# Altium PCB CAN-to-CAN.PcbDoc (part 2 of 2)
Units mil, origin at the board's own origin, x right, y up, seen from the top; angles counter-clockwise.
Board outline 5998 x 3656 mil, 2 copper layers (Top Layer, Bottom Layer); 112 components, 87 nets, 365 pads, 152 vias.
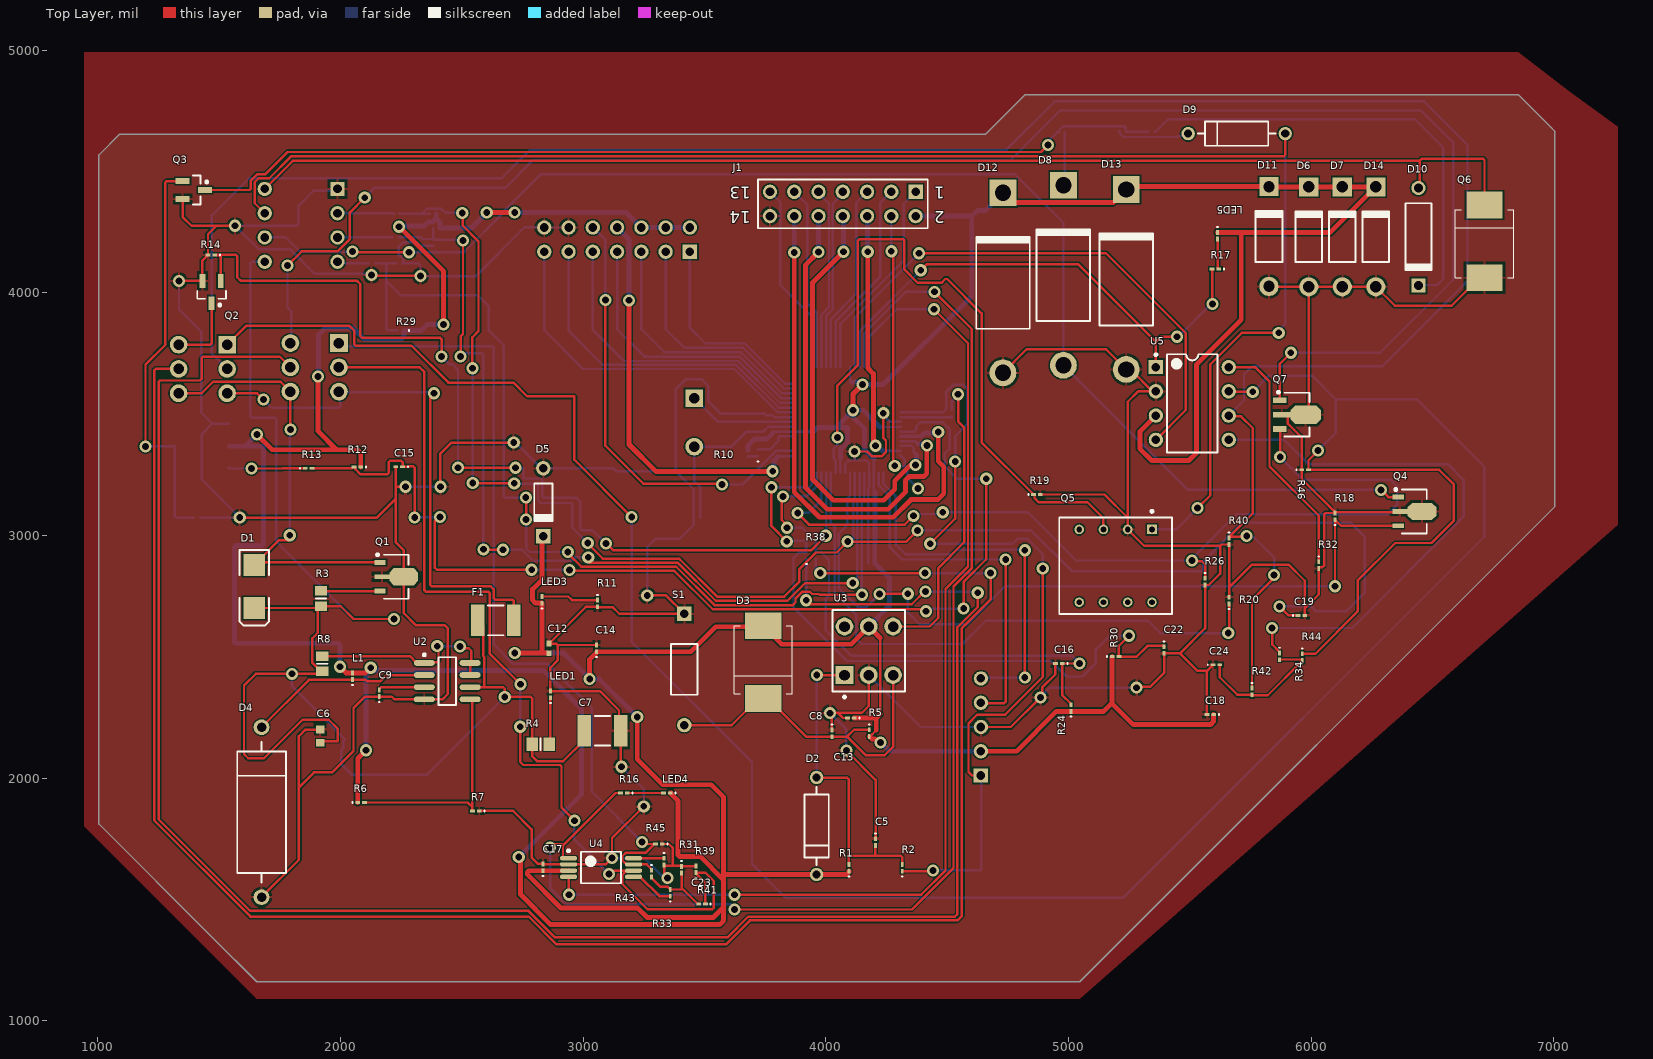
[diagram p0: Top Layer view]

## Via types
v1: diameter 50, hole 28, Top Layer to Bottom Layer, 152 vias

## Nets (pads, with @x,y where several pads share a name; then routed paths per layer and width w, separated by ;. In a path a pad name is that pad's centre, name@x,y a point inside that pad or via, vN(x,y) a via of type N, cw(c..) or ccw(c..) an arc to the next point about the centre after c; other vN are vias at no path point) (continued)
NetR9_2: (continued)
  Bottom Layer w10: U1.8 4308.7,3487.61 4518.09,3487.61 4519,3488.51 R9.2
NetR10_2: R10.2 U1.37 | length 181.8
  Bottom Layer w10: R10.2 3769.78,3354.78 3803.56,3388.56 3803.56,3402.56 3809.52,3408.52 U1.37
NetR31_1: R31.1 U4.8 | length 126.4
  Top Layer w10: U4.8 3333.39,1670.39 R31.1
NetR32_1: R32.1 U5.8 | length 1019.5
  Top Layer w10: U5.8 5769,3694 5828,3635 5828,3285 6031,3082 R32.1
NetR33_1: R33.1 U4.5 | length 184.1
  Top Layer w10: U4.5 3234.43,1593.61 3314.11,1513.94 R33.1
NetR34_1: R34.1 U5.5 | length 2282.3
  Top Layer w10: v1(5839,2619) 5840,2618 5840,2549.94 5870,2519.94 R34.1
  Bottom Layer w10: U5.5 5889,3394 5989,3294 6563,3294 6628,3229 6628,3078 6169,2619 v1(5839,2619)
PGC: J7.5 U1.17 | length 1581.3
  Top Layer w10: v1@4819,2414 v1(4820,2415) v1(4820,2939)
  Bottom Layer w10: U1.17 4237.49,3212.51 4289,3161 4289,2962.14 4328.14,2923 4521.43,2923 4538.93,2940.5 4818.5,2940.5 v1(4820,2939) ; J7.5 4641,2413 4818,2413 v1(4820,2415)
PGD: J7.4 U1.18 | length 1516.2
  Top Layer w10: J7.4 4641,2309 4735.14,2309 4741,2314.86 v1(4741,2901)
  Bottom Layer w10: U1.18 4217.8,3208.2 4263,3163 4263,2952 4314,2901 v1(4741,2901)
RESET: C5.2 D2.1 R1.2 R2.2 U3.1 | length 1322.1
  Top Layer w10: D2.1 3963,2002 4088.14,2002 4094,1996.14 4094,1674.14 ; v1(3963,2425) U3.1 ; R1.2 4094.09,1645.47 4094.09,1662.05 4094,1662.14 4094,1674.14 ; C5.2 4204.5,1722.72 4204.5,1680 ; R2.2 4315,1674.14 4309.14,1680 4204.5,1680 ; 4094,1674.14 4099.86,1680 4200,1680 4204.5,1680
  Bottom Layer w10: D2.1 3962.5,2003.5 3962.5,2424.5 v1(3963,2425)
RX: J2.10 U1.34 | length 1824.2
  Top Layer w10: v1(3092,3970) 3092,3370 3248,3214 3568,3214 v1(3572,3210)
  Bottom Layer w10: J2.10 3092,4217 v1(3092,3970) ; v1(3572,3210) 3657,3210 3796.81,3349.81 3871,3349.81 U1.34
TX: J2.8 U1.33 | length 1693
  Top Layer w20: v1(3189,3969) 3189,3375 3301,3263 3779,3263 v1(3781,3265)
  Bottom Layer w10: 3804,3326 3867.57,3326 U1.33
  Bottom Layer w20: J2.8 3189,4220 v1(3189,3969) ; v1(3781,3265) 3786.74,3270.74 3786.74,3308.74 3804,3326
WDI: R9.1 U3.4 | length 1251.2
  Top Layer w10: U3.4 4428,2625 4464,2661 4464,2866 4570,2972 4570,3445 4545,3470 v1(4545,3582)
  Bottom Layer w10: R9.1 4519,3551.43 4545,3577.43 v1(4545,3582)
pads on no net: Q5.4 Q5.5 Q5.6 Q5.7 Q5.8 U1.1 U1.2 U1.3 U1.4 U1.5 U1.6 U1.35 U1.36 U1.62 U1.63 U1.64 U3.6

## Polygon pours and split planes (outlines as drawn)
GND on Bottom Layer "Bottom Layer-GND" (solid, pour order 6): 5759,5084
GND on Bottom Layer "GND_L02_P004" (solid, pour order 4): 902.35,4591.35 1258,4947 7106,4947 7106,2973.9 5046,1052.86 902.35,1052.86 937,3436
GND on Top Layer "Top Layer-GND" (solid, pour order 8): 944.5,4992.11 6853,4992.11 7060,4832 7264,4685 7264,3045 5046,1091 1655,1091 944.5,1801.5 944.5,2292

## Silkscreen, mask and mechanical layers (free items; w line width, h text height)
Mechanical 1:
  lines w10: 1005,1811 1005,4568 1090,4653 2817.75,4653 4658,4653 4822,4817 6853,4817 6931,4739 6949,4721 6985,4685 7003,4667 7003,3118 5046,1161 1655,1161 1473,1343 1005,1811

## Text inside footprints (layer, text, board x,y; h text height)
J1: Top Overlay "13" at 3690,4436 h50 r180; Top Overlay "14" at 3690,4336 h50 r180; Top Overlay "1" at 4490,4436 h50 r180; Top Overlay "2" at 4490,4336 h50 r180
J2: Bottom Overlay "13" at 2760,4149 h50; Bottom Overlay "14" at 2760,4249 h50; Bottom Overlay "1" at 3560,4149 h50; Bottom Overlay "2" at 3567,4255 h50